# Altium PCB TK032F8004_TK499.PcbDoc
Units mm, origin at the board's own origin, x right, y up, seen from the top; angles counter-clockwise.
Board outline 50.5 x 93.4 mm, 2 copper layers (Top Layer, Bottom Layer); 81 components, 103 nets, 452 pads, 351 vias.
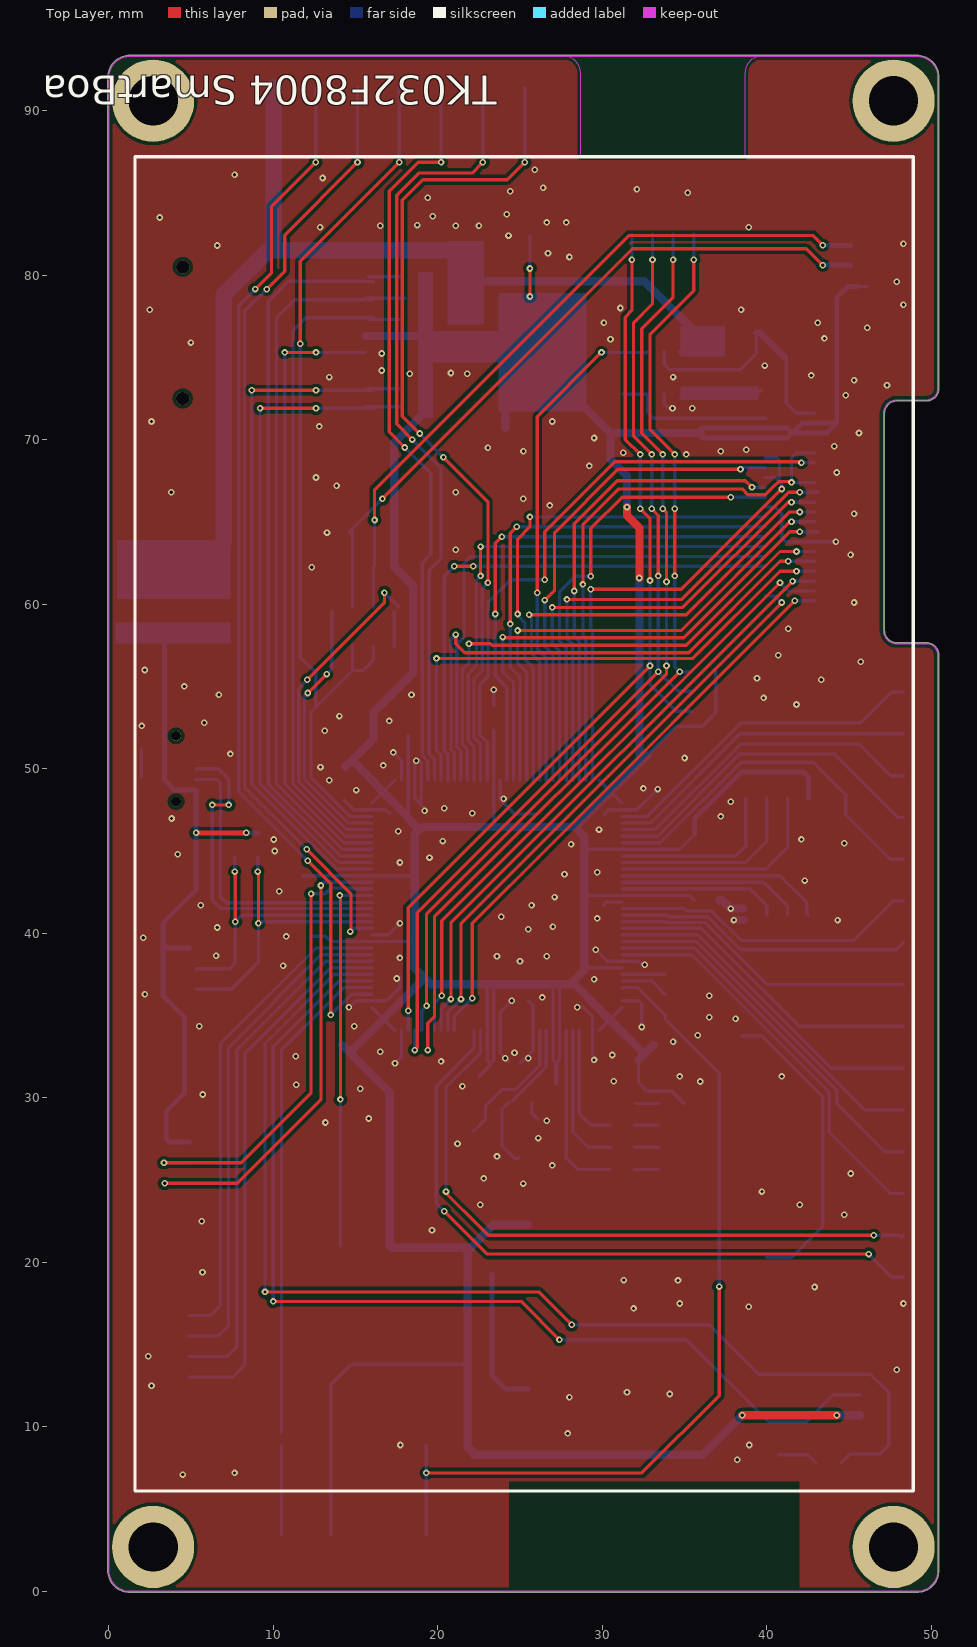
[diagram p0: Top Layer view]
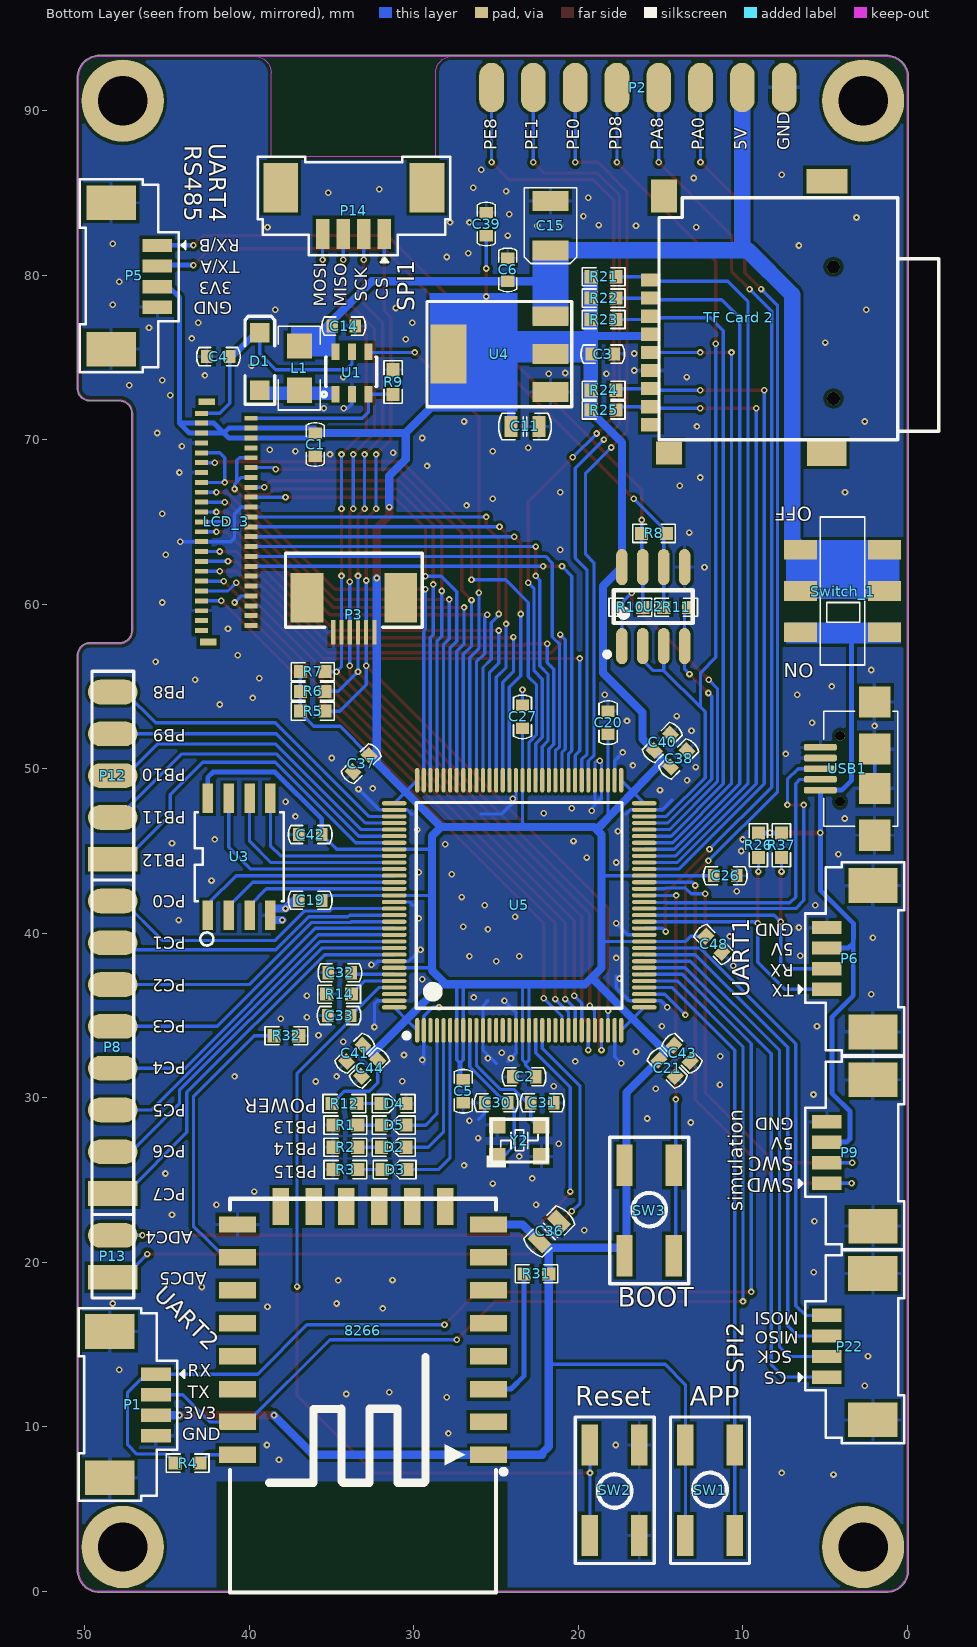
[diagram p1: Bottom Layer view, seen from below]
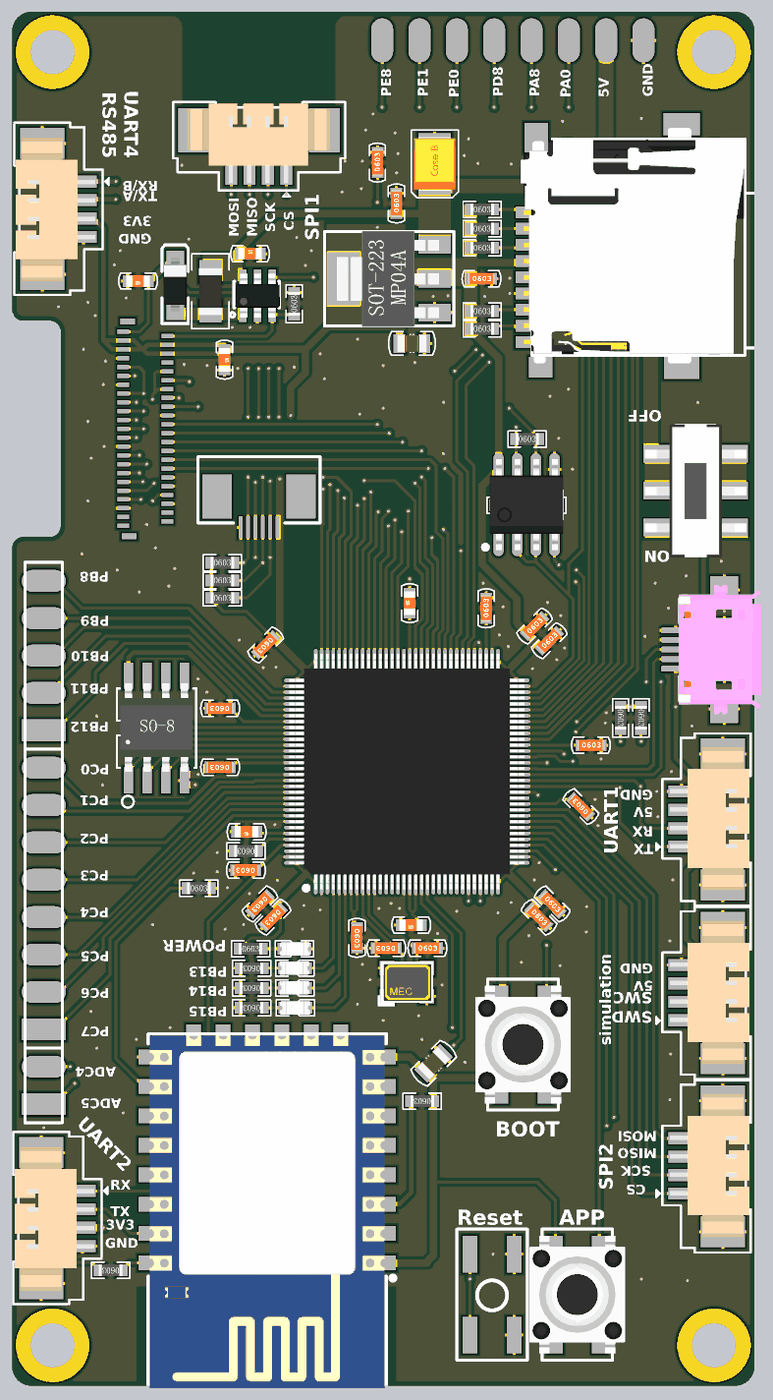
[diagram p2: 3D render of the assembled board from below, using the file's embedded part models]

## Layer stack, top to bottom
Top Solder: solder mask 0.0102, Solder Resist, Dk 3.5
Top Layer: signal copper 0.0356
Dielectric1: dielectric 0.32, FR-4, Dk 4.8
Bottom Layer: signal copper 0.0356
Bottom Solder: solder mask 0.0102, Solder Resist, Dk 3.5

## Board outline
-0.05,1.27 ccw(c1.27,1.27) 1.27,-0.05 49.13,-0.05 ccw(c49.13,1.27) 50.45,1.27 50.45,56.9 ccw(c49.7,56.9) 49.832,57.638 49.8,57.65 47.9,57.65 cw(c47.9,58.4) 47.15,58.4 47.15,71.6 cw(c47.9,71.6) 47.9,72.35 49.7,72.35 ccw(c49.7,73.1) 50.45,73.1 50.45,92.03 ccw(c49.13,92.03) 49.13,93.35 1.27,93.35 ccw(c1.27,92.03) -0.05,92.03

## Design rules (kind name [scope] priority, off if disabled: settings)
Clearance Clearance_1 [inpolygon] p1: gap=0.2 // poly
Clearance [All] p2: gap=0.15
ComponentClearance [All] p1 off: gap=0.254 collisioncheckmode=3 verticalgap=0.254 showdistances=FALSE
Height [All] p1 off: minheight=0 maxheight=25.4 prefheight=12.7
HoleSize [All] p1 off: absolutevalues=TRUE maxlimit=2.54 minlimit=0.025 maxpercent=80.000 minpercent=20.000
MinimumSolderMaskSliver [All] p1 off: minsoldermaskwidth=0.254
PlaneConnect [All] p1: planeconnectstyle=Direct reliefexpansion=0.508 reliefentries=4 reliefconductorwidth=0.254 reliefairgap=0.254
PolygonConnect PolygonConnect_1 [IsVia] p1: connectstyle=Direct reliefconductorwidth=0.2 reliefentries=4 polygonreliefangle="90 Angle" airgapwidth=0.2
PolygonConnect [All] p2: connectstyle=Relief reliefconductorwidth=0.2 reliefentries=4 polygonreliefangle="90 Angle" airgapwidth=0.2
RoutingVias [All] p1: holewidth=0.711 width=1.27 viastyle="Through Hole" minholewidth=0.711 minwidth=1.27 maxholewidth=0.711 maxwidth=1.27
SilkToBoardRegionClearance [All] p1 off:
SilkToSilkClearance [All] p1 off: silktosilkclearance=0.254
SilkToSolderMaskClearance SilkscreenOverComponentPads [IsPad] p1 off: minsilkscreentomaskgap=0.254 clearancetoexposedcopper=TRUE
SolderMaskExpansion [All] p1: expansion=0.102
UnRoutedNet UnRoutedNet_1 [All] p1:
UnRoutedNet [All] p2:
Width [All] p1: maxlimit=2 minlimit=0.2 preferedwidth=0.2 minimp=50.000000 maximp=50.000000 favimp=50.000000
21 further rules are at their usual default settings.

## Components (designator, comment, footprint, x,y, rotation, side; value= is the part's Value field where it differs from the comment)
8266 "ESP8266-12E" ESP8266-12E 33.2,12 r0 bottom locked
C1 "475" C0603-2 36,70.4 r270 bottom
C2 "475" C0603-2 22.6,31.275 r0 bottom
C3 "104" C0603-1 19.22,75.2 r180 bottom
C4 "104" C0603-2 41.184,75.05 r0 bottom
C5 "104" C0603-1 27,31.1 r270 bottom
C6 "104" C0603-1 24.3,79.619 r90 bottom
C11 "22uF" C0805-3 24.1,70.8 r180 bottom
C14 "475" C0603-2 34.965,76.9 r180 bottom
C15 "100uF" "Case B 3528" 21.7,83 r90 bottom
C19 "104" C0603-1 35.6,42 r0 bottom
C20 "104" C0603-1 18.2,52.1 r90 bottom
C21 "104" C0603-1 15.1,32.3 r225 bottom
C26 "104" C0603-1 11.775,43.5 r180 bottom
C27 "104" C0603-2 23.4,52.449 r90 bottom
C30 "22pF" C0603-1 24.3,29.7 r0 bottom
C31 "22pF" C0603-1 22.9,29.7 r180 bottom
C32 "225" C0603-2 33.8,37.6 r0 bottom
C33 "104" C0603-1 33.845,35 r0 bottom
C36 "22uF" C0805-3 22.373,21.273 r135 bottom
C37 "104" C0603-1 32.71,50.8 r315 bottom
C38 "104" C0603-1 14.4,50.1 r135 bottom
C39 "104" C0603-1 25.6,82.4 r90 bottom
C40 "104" C0603-1 15.4,51.1 r135 bottom
C41 "104" C0603-1 33.1,33.2 r315 bottom
C42 "104" C0603-1 35.6,46 r0 bottom
C43 "104" C0603-1 14.2,33.2 r225 bottom
C44 "104" C0603-1 32.2,32.3 r315 bottom
C48 "104" C0603-1 11.268,38.827 r45 bottom
D1 "SS14" SOD123 39.365,73 r90 bottom
D2 "LED" D0603 30.475,26.999 r0 bottom
D3 "LED" D0603 30.425,25.64 r0 bottom
D4 "LED" D0603 31.988,29.65 r180 bottom
D5 "LED" D0603 30.475,28.34 r0 bottom
L1 "22uH" L1206 36.965,73 r90 bottom
LCD_3 "TK032F8004" TK032F8004 48.9,87.2 r180 top locked
P1 "BHEADSMD1x4" BHEADSMD1x4 45.676,13.2 r90 bottom locked
P2 "PC0~PC7" HDR1X8#1 7.5,91.4 r0 top locked
P3 "TP_Cap_3.2inch" TK032F8004_CTP 1.6,6.1 r0 top locked
P5 "BHEADSMD1x4" BHEADSMD1x4 45.6,81.8 r90 bottom locked
P6 "BHEADSMD1x4" BHEADSMD1x4 4.904,36.6 r270 bottom locked
P8 "PC0~PC7" HDR1X8#2 48.3,24.18 r90 bottom
P9 "SW仿真接口" BHEADSMD1x4 4.904,24.8 r270 bottom locked
P12 "Header 5" HDR1X5 48.3,44.5 r90 bottom
P13 "Header 2" HDR1X2 48.3,19.1 r90 bottom
P14 "Header 4" BHEADSMD1x4 31.8,82.5 r180 bottom locked
P22 "BHEADSMD1x4" BHEADSMD1x4 4.904,13.025 r270 bottom locked
R1 "4.7K" R0603 33.417,28.34 r0 bottom
R2 "4.7K" R0603 33.417,26.999 r0 bottom
R3 "4.7K" R0603 33.417,25.64 r0 bottom
R4 "4.7K" R0603 43,7.8 r0 bottom
R5 "47K" R0603 36.9,53.5 r180 bottom
R6 "47K" R0603 36.9,54.7 r180 bottom
R7 "18K" R0603 36.9,55.899 r180 bottom
R8 "510R" R0603 16.159,64.302 r180 bottom
R9 "5R1" R0603 31.265,72.75 r90 bottom
R10 "0R" R0603 17.589,59.805 r180 bottom
R11 "0R" R0603 13.319,59.805 r0 bottom
R12 "4.7K" R0603 34.975,29.65 r180 bottom
R14 "10K" R0603 33.8,36.3 r0 bottom
R21 "10K" R0603 19.22,79.9 r180 bottom
R22 "10K" R0603 19.22,78.6 r180 bottom
R23 "10K" R0603 19.22,77.3 r180 bottom
R24 "10K" R0603 19.22,73 r180 bottom
R25 "10K" R0603 19.22,71.8 r180 bottom
R26 "4.7K" R0603 9.062,46.1 r270 bottom
R31 "1K" R0603 21.8,19.3 r0 bottom
R32 "1K" R0603 38.5,33.775 r180 bottom
R37 "4.7K" R0603 7.662,46.1 r270 bottom
SW1 "SW" SW 10.5,3.4 r90 bottom
SW2 "SW" SW 19.3,8.9 r270 bottom
SW3 "SW" SW 14.2,20.4 r90 bottom
Switch_1 "Switch_6脚贴片" SWITCH_6脚贴片 1.4,58.3 r90 bottom
"TF Card 2" "TF 卡" Micro_SD 15.5,79.7 r270 bottom locked
U1 "PT4103" SOT23-6 34.765,72.75 r90 bottom locked
U2 "MAX485" SOP8-150 17.359,57.451 r90 bottom
U3 "W25Q32" SOP8-215-50 42.53,41.1 r90 bottom
U4 "AMS1117-3.3V" SOT-223 21.7,72.9 r90 bottom
U5 "TKM32F499GT8" LQFP128 29.8,34.1 r180 bottom locked
USB1 "Micro USB" MicroUSB_带定位柱 4.6,50 r90 bottom locked
Y2 "12M" X3225 23.6,27.4 r180 bottom

## Footprints (in the part's own frame and the unit in brackets; to place one, negate y for a bottom-side part, rotate by r counter-clockwise, add the part's x,y. Pads: shape width x height; smd on the part's side, far side on the other; paste and mask are expansions set on the pad)
BHEADSMD1x4 [mil]
  rect 32x71 smd: 1(0,0) 2(-49.21,0) 3(-98.43,0) 4(-147.64,0)
  rect 83x118 smd: 5(102.36,110.24) 6(-248.03,110.24)
  silkscreen extent -303,-68 158,185, body extent -267,-32 117,181, height 134
C0603-1 [mm]
  rect 0.7x0.8 smd mask+0.1: 1(0,0) 2(1.4,0)
  silkscreen extent -0.62,-0.55 2.02,0.55, body extent -0.3,-0.39 1.7,0.39, height 0.79
C0603-2 [mm]
  rect 0.7x0.8 smd mask+0.1: 1(0,0) 2(1.4,0)
  silkscreen extent -0.62,-0.55 2.02,0.55, body extent -0.1,-0.4 1.5,0.4, height 0.3
C0805-3 [mm]
  rect 0.8x1.27 smd mask+0.1: 1(0,0) 2(1.7,0)
  silkscreen extent -0.75,-0.8 2.45,0.8, body extent -0.15,-0.6 1.85,0.6, height 1.2
"Case B 3528" [mm]
  rect 1.2x2.2 smd: 1(-1.5,0) 2(1.5,0)
  silkscreen extent -2.3,-1.6 2.3,1.6, body extent -1.85,-1.4 1.85,1.42, height 2.09
D0603 [mm]
  rect 0.8x0.8 smd mask+0.1: 1(0,0) 2(1.5,0)
  silkscreen extent -0.55,-0.55 2.05,0.55, body extent -0.26,-0.46 1.8,0.45, height 0.85
ESP8266-12E [mm]
  rect 2.25x1 smd: 1(-7.725,3.7) 2(-7.725,1.7) 3(-7.725,-0.3) 4(-7.725,-2.3) 5(-7.725,-4.3) 6(-7.725,-6.3) 7(-7.725,-8.3) 8(-7.725,-10.3) 15(7.525,-10.3) 16(7.525,-8.3) 17(7.525,-6.3) 18(7.525,-4.3) 19(7.525,-2.3) 20(7.525,-0.3) 21(7.525,1.7) 22(7.525,3.7)
  rect 1x2.25 smd: 9(-5.1,-11.4) 10(-3.1,-11.4) 11(-1.1,-11.4) 12(0.9,-11.4) 13(2.9,-11.4) 14(4.9,-11.4)
  silkscreen extent -8.8,-11.87 7.98,12.07, body extent -8.1,-11.79 7.9,12.21, height 2.75
HDR1X2 [mm] "Connector; Header; 2 Position"
  rect 1.5x3 smd: 1(0,0)
  oval 1.5x3 smd: 2(2.54,0)
  silkscreen extent -1.27,-1.27 3.81,1.27
HDR1X5 [mm] "Connector; Header; 5 Position"
  rect 1.5x3 smd: 1(0,0)
  oval 1.5x3 smd: 2(2.54,0) 3(5.08,0) 4(7.62,0) 5(10.16,0)
  silkscreen extent -1.27,-1.27 11.43,1.27
HDR1X8#1 [mm] "Connector; Header; 8 Position"
  oval 1.5x3 smd far side: 1(0,0) 2(2.54,0) 3(5.08,0) 4(7.62,0) 5(10.16,0) 6(12.7,0) 7(15.24,0) 8(17.78,0)
HDR1X8#2 [mm] "Connector; Header; 8 Position"
  rect 1.5x3 smd: 1(0,0)
  oval 1.5x3 smd: 2(2.54,0) 3(5.08,0) 4(7.62,0) 5(10.16,0) 6(12.7,0) 7(15.24,0) 8(17.78,0)
  silkscreen extent -1.27,-1.27 19.05,1.27
L1206 [mil]
  rect 60x60 smd: 1(0,0) 2(106.3,0)
  silkscreen extent -47,-50 154,50, body extent -11,-32 115,31, height 43
LQFP128 [mm]
  oval 0.25x1.5 smd mask+0.051: 1(0,0) 2(0.4,0) 3(0.8,0) 4(1.2,0) 5(1.6,0) 6(2,0) 7(2.4,0) 8(2.8,0) 9(3.2,0) 10(3.6,0) 11(4,0) 12(4.4,0) 13(4.8,0) 14(5.2,0) 15(5.6,0) 16(6,0) 17(6.4,0) 18(6.8,0) 19(7.2,0) 20(7.6,0) 21(8,0) 22(8.4,0) 23(8.8,0) 24(9.2,0) 25(9.6,0) 26(10,0) 27(10.4,0) 28(10.8,0) 29(11.2,0) 30(11.6,0) 31(12,0) 32(12.4,0) 65(12.4,15.2) 66(12,15.2) 67(11.6,15.2) 68(11.2,15.2) 69(10.8,15.2) 70(10.4,15.2) 71(10,15.2) 72(9.6,15.2) 73(9.2,15.2) 74(8.8,15.2) 75(8.4,15.2) 76(8,15.2) 77(7.6,15.2) 78(7.2,15.2) 79(6.8,15.2) 80(6.4,15.2) 81(6,15.2) 82(5.6,15.2) 83(5.2,15.2) 84(4.8,15.2) 85(4.4,15.2) 86(4,15.2) 87(3.6,15.2) 88(3.2,15.2) 89(2.8,15.2) 90(2.4,15.2) 91(2,15.2) 92(1.6,15.2) 93(1.2,15.2) 94(0.8,15.2) 95(0.4,15.2) 96(0,15.2)
  oval 1.5x0.25 smd mask+0.051: 33(13.8,1.4) 34(13.8,1.8) 35(13.8,2.2) 36(13.8,2.6) 37(13.8,3) 38(13.8,3.4) 39(13.8,3.8) 40(13.8,4.2) 41(13.8,4.6) 42(13.8,5) 43(13.8,5.4) 44(13.8,5.8) 45(13.8,6.2) 46(13.8,6.6) 47(13.8,7) 48(13.8,7.4) 49(13.8,7.8) 50(13.8,8.2) 51(13.8,8.6) 52(13.8,9) 53(13.8,9.4) 54(13.8,9.8) 55(13.8,10.2) 56(13.8,10.6) 57(13.8,11) 58(13.8,11.4) 59(13.8,11.8) 60(13.8,12.2) 61(13.8,12.6) 62(13.8,13) 63(13.8,13.4) 64(13.8,13.8) 97(-1.4,13.8) 98(-1.4,13.4) 99(-1.4,13) 100(-1.4,12.6) 101(-1.4,12.2) 102(-1.4,11.8) 103(-1.4,11.4) 104(-1.4,11) 105(-1.4,10.6) 106(-1.4,10.2) 107(-1.4,9.8) 108(-1.4,9.4) 109(-1.4,9) 110(-1.4,8.6) 111(-1.4,8.2) 112(-1.4,7.8) 113(-1.4,7.4) 114(-1.4,7) 115(-1.4,6.6) 116(-1.4,6.2) 117(-1.4,5.8) 118(-1.4,5.4) 119(-1.4,5) 120(-1.4,4.6) 121(-1.4,4.2) 122(-1.4,3.8) 123(-1.4,3.4) 124(-1.4,3) 125(-1.4,2.6) 126(-1.4,2.2) 127(-1.4,1.8) 128(-1.4,1.4)
  silkscreen extent -0.8,-0.47 12.45,13.85, body extent -1.8,-0.4 14.2,15.6, height 1.45
Micro_SD [mm]
  rect 1.5x2.5 smd: 0(-6,10.6)
  rect 2x1.6 smd: 0(-5.1,0.7)
  rect 1.4x1.6 smd: 0(10.5,1)
  rect 1.6x2.4 smd: 0(10.5,10.6)
  rect 0.8x1.2 smd: 1(0,-0.1) 2(1.1,-0.1) 3(2.2,-0.1) 4(3.3,-0.1) 5(4.4,-0.1) 6(5.5,-0.1) 7(6.6,-0.1) 8(7.7,-0.1) 9(8.8,-0.1)
  silkscreen extent -5,0.4 9.7,17.4, body extent -5.75,-0.4 10.25,14.85, height 1.85
MicroUSB_带定位柱 [mm]
  rrect50% 0.4x2 smd: 1(-1.3,0.7) 2(-0.65,0.7) 3(0,0.7)
  rrect50% 0.4x2 smd mask+0.1: 4(0.65,0.7) 5(1.3,0.7)
  rect 1.9x1.9 smd: 6(-4.05,-2.6) 7(-1.2,-2.6) 8(1.2,-2.6) 9(4.05,-2.6)
  round 0.6 hole 0.6: 10(-2,-0.5) 11(2,-0.5)
  silkscreen extent -3.5,-4 3.5,0.5, body extent -4.4,-5.12 4.4,0.51, height 2.79
R0603 [mm]
  rect 0.8x0.8 smd mask+0.1: 1(0,0) 2(1.5,0)
  silkscreen extent -0.55,-0.55 2.05,0.55, body extent -0.05,-0.4 1.55,0.4, height 0.45
SOD123 [mm]
  rect 1.2x1.2 smd: 1(0,0) 2(3.5,0)
  silkscreen extent -0.85,-0.9 4.5,0.9, body extent -0.05,-0.8 3.65,0.8, height 1.27
SOP8-150 [mm]
  oval 2.2x0.7 smd: 1(0,0) 2(0,-1.27) 3(0,-2.54) 4(0,-3.81) 5(4.8,-3.81) 6(4.8,-2.54) 7(4.8,-1.27) 8(4.8,0)
  silkscreen extent -0.65,-4.31 3.4,1.04, body extent -0.7,-4.41 5.5,0.59, height 1.75
SOP8-215-50 [mil]
  rect 70x25 smd: 1(0,0) 2(0,-50) 3(0,-100) 4(0,-150) 5(280,-150) 6(280,-100) 7(280,-50) 8(280,0)
  silkscreen extent -73,-181 246,31, body extent 24,-171 260,22
SOT23-6 [mm]
  rect 1x0.5 smd: 1(0,0) 2(0,-1) 3(0,-2) 4(2.6,-2) 5(2.6,-1) 6(2.6,0)
  silkscreen extent -0.15,-2.5 2.27,0.85, body extent -0.2,-2.52 2.8,0.48, height 1.3
SOT-223 [mm]
  rect 1.2x2.2 smd: 1(0,0) 2(2.3,0) 3(4.6,0)
  rect 3.6x2.2 smd: 2(2.3,6.2)
  silkscreen extent -0.9,-1.3 5.5,7.5, body extent -0.97,-0.31 5.53,6.65
SW [mm]
  rect 2.5x1 smd: 1(0,0) 2(5.5,0) 3(5.5,3) 4(0,3)
  silkscreen extent -1.7,-0.9 7.2,3.9, body extent -1.25,-1.75 6.75,4.75, height 4.3
SWITCH_6脚贴片 [mm]
  rect 1.2x2 smd: 1(0,5.1) 2(2.5,5.1) 3(5,5.1) 4(0,0) 5(2.5,0) 6(5,0)
  silkscreen extent -2,1.2 7,3.9, body extent -2.05,-0.9 7,6, height 5.45
TK032F8004 [mm]
  rect 1x0.4 smd far side: 0(6.3,14.9) 0(6.4,29.5)
  rect 0.8x0.3 smd far side: 1(6,28.8) 2(9,28.5) 3(6,28.2) 4(9,27.9) 5(6,27.6) 6(9,27.3) 7(6,27) 8(9,26.7) 9(6,26.4) 10(9,26.1) 11(6,25.8) 12(9,25.5) 13(6,25.2) 14(9,24.9) 15(6,24.6) 16(9,24.3) 17(6,24) 18(9,23.7) 19(6,23.4) 20(9,23.1) 21(6,22.8) 22(9,22.5) 23(6,22.2) 24(9,21.9) 25(6,21.6) 26(9,21.3) 27(6,21) 28(9,20.7) 29(6,20.4) 30(9,20.1) 31(6,19.8) 32(9,19.5) 33(6,19.2) 34(9,18.9) 35(6,18.6) 36(9,18.3) 37(6,18) 38(9,17.7) 39(6,17.4) 40(9,17.1) 41(6,16.8) 42(9,16.5) 43(6,16.2) 44(9,15.9) 45(6,15.6)
  silkscreen extent 0,0 47.3,81.1
TK032F8004_CTP [mm]
  rect 0.25x1.5 smd far side: 1(30.8,52.2) 2(31.3,52.2) 3(31.8,52.2) 4(32.3,52.2) 5(32.8,52.2) 6(33.3,52.2)
  rect 2x3 smd far side: 7(29.2,54.3)
  rect 2x3 smd far side paste+0: 8(34.9,54.3)
  silkscreen extent 0,0 47.3,81.1
X3225 [mm]
  rect 1x1 smd: 1(-1.346,-0.965) 2(1.346,-0.965) 3(1.346,0.94) 4(-1.346,0.94)
  silkscreen extent -1.98,-1.65 1.7,1.3, body extent -1.55,-1.28 1.65,1.22, height 0.72

## Part data
C1 C2 C3 C4 C5 C6 C11 C14 C15 C19 C20 C21 C26 C27 C30 C31 C32 C33 C36 C37 C38 C39 C40 C41 C42 C43 C44 C48: library part cap
D1: library part "D Schottky", "Schottky Diode"
L1: library part Inductor
P2 P8: library part "Header 8", "Header, 8-Pin"
P3: library part BHEADSMD1x6
P9: library part BHEADSMD1x4
P12: "Header, 5-Pin"
P13: "Header, 2-Pin"
P14: "Header, 4-Pin"
R1 R2 R3 R4 R5 R6 R7 R8 R9 R10 R11 R12 R14 R21 R22 R23 R24 R25 R26 R31 R32 R37: library part Resistor
"TF Card 2": library part "Header 9", "Header, 9-Pin"
U1: library part PT4101
U3: library part W25Q16
U4: library part CON3, "Connector"
USB1: library part "Mini USB"
Y2: library part 晶振_无源_4PIN_SMD

## Free pads (board coordinates)
  round 5 hole 3: 3(2.7,2.7) 3(2.7,90.6) 3(47.7,2.7) 3(47.7,90.6)

## Via types
v1: diameter 0.4, hole 0.2, Top Layer to Bottom Layer, tented both sides, 349 vias
v2: diameter 0.8, hole 0.8, Top Layer to Bottom Layer, tented both sides, 2 vias

## Nets (pads, with @x,y where several pads share a name; then routed paths per layer and width w, separated by ;. In a path a pad name is that pad's centre, name@x,y a point inside that pad or via, vN(x,y) a via of type N, cw(c..) or ccw(c..) an arc to the next point about the centre after c; other vN are vias at no path point)
3.3V: 8266.1 8266.8 "TF Card 2.4" C1.1 C2.1 C3.1 C5.1 C11.1 C19.1 C20.1 C21.1 C26.1 C27.1 C36.1 C37.1 C38.1 C39.1 C40.1 C41.1 C42.1 C43.1 C44.1 C48.2 LCD_3.40 LCD_3.41 LCD_3.42 LCD_3.43 P1.3 P3.1 P5.3 R5.1 R6.1 R7.1 R12.1 R21.1 R22.1 R23.1 R24.1 R25.1 R31.1 SW1.3 SW1.4 SW3.3 SW3.4 U2.8 U3.8 U4.2 U5.1 U5.7 U5.8 U5.17 U5.18 U5.32 U5.33 U5.43 U5.53 U5.64 U5.65 U5.67 U5.80 U5.96 U5.97 U5.104 U5.111 U5.122 U5.128 | length 341.6
  Top Layer w0.2: v1(25.6,78.7) v1(25.6,80.4)
  Top Layer w0.5: v1(31.5,65.9) 31.5,65.384 32.253,64.631 v1(32.253,61.588) ; v1(38.5,10.7) v1(44.25,10.7)
  Bottom Layer w0.2: C26.1 12.5,43.5 U5.53 18.6,43.5 ; C48.2 13.176,39.817 13.493,39.5 U5.43 18.6,39.5 ; SW1.4 SW1.3 13.5,12.57 14.73,13.8 21.8,13.8 ; U5.33 16.7,34.8 U5.32 ; U5.64 16.688,48.588 U5.65 ; 18.2,47.016 U5.67 C20.1@18.2,52.02 ; C2.1@22.5,31.275 23.2,31.975 23.2,32.1 ; 23,36.7 U5.18 23,32.3 23.2,32.1 ; 23.4,36.7 U5.17 23.4,32.3 23.2,32.1 ; 23.4,46.45 U5.80 C27.1@23.4,52.349 ; v1(25.6,80.4) C39.1 ; 27,36.7 U5.8 27,32.3 27.2,32.1 27.4,32.3 U5.7 27.4,36.9 ; 28.9,42.3 U5.111 35.3,42.3 C19.1 ; 29,45.1 U5.104 34.7,45.1 C42.1 ; 29.05,37.9 U5.122 ; U5.1 30.45,34.75 U5.128 ; U5.96 30.5,48.6 U5.97 ; C44.1 32.2,30.9 32.7,30.4 34.225,30.4 R12.1 ; C37.1 34.491,52.581 36.081,52.581 36.9,53.4 R5.1 R6.1 R7.1 ; P5.3 P5.3@46.1,79.3
  Bottom Layer w0.25: C37.1@32.705,50.805 C37.1
  Bottom Layer w0.3: C5.1@27.2,30.9 27.2,32.1 ; C42.1 35.6,46.953 38.447,49.8 42.2,49.8 42.53,49.47 U3.8 ; C1.1@36,70.2 C1.1 ; C1.1@36,70.7 LCD_3.42 41.25,70.7 41.55,70.4 ; C1.1@36.1,70.1 LCD_3.40 41.25,70.1 41.55,70.4 ; 44.25,74.7 44.25,75.95 ; P5.3@45.5,79.3 44.9,79.3 44.25,78.65 44.25,75.95 ; 41.55,70.4 42.15,71 LCD_3.43 44.25,71 ; 41.55,70.4 LCD_3.41 43.65,70.4 44.25,71 ; 44.25,71 44.25,75.95
  Bottom Layer w0.5: C43.1 14.65,32.75 ; C38.1 14.825,50.525 14.833,50.516 16.688,48.588 18.2,47.016 18.204,47.012 18.798,46.394 ; C38.1@14.41,50.2 14.5,50.2 C40.1 16.1,51.8 16.1,53.43 18.5,55.83 18.5,61.109 U2.8 17.359,69.828 19.22,71.689 R25.1 ; 15.6,76.3 19.22,76.3 ; SW3.4@17.085,21 17.085,30.315 15.8,31.6 C21.1 14.65,32.75 ; SW3.4@17.201,20.884 C36.1@21.984,20.884 ; 19.15,37.25 16.7,34.8 14.65,32.75 ; 19.22,72.2 R25.1 ; 19.22,76.4 R23.1 R22.1 R21.1 ; 21.2,76.1 U4.2@22.1,75.2 ; 21.8,13.7 R31.1 21.8,20.7 23.4,22.3 8266.8 ; 21.8,13.8 21.8,8.8 22.2,8.4 ; 22.2,8.3 8266.1 36.1,8.3 v1(38.5,10.7) ; 23.9,76.3 19.22,76.3 ; C11.1@24.1,70.7 24.1,72.4 ; U4.2@28.1,73.7 28.1,72.8 30.5,70.4 ; 28.2,78.2 28.8,78.2 28.8,77.9 ; 28.3,36.9 30.45,34.75 32.55,32.65 ; v1(31.5,65.9) 31.5,67.8 30.5,68.8 30.5,70.4 ; C44.1 32.55,32.65 ; 32.253,50.353 v1(32.253,61.588) ; C37.1@32.705,50.805 30.5,48.6 28.35,46.45 ; C41.1 32.55,32.65 ; C1.1 30.5,70.4 ; v1(44.25,10.7) P1.3 ; R25.1 R24.1 19.22,76.3 ; 28.35,46.45 23.4,46.45 19.05,46.45 18.6,46 18.6,37.9 19.6,36.9 27.4,36.9 28.05,36.9 28.9,37.75 28.9,45.9 28.35,46.45
5V: C6.1 C14.1 C15.1 L1.2 P2.2 Switch_1.2 Switch_1.3 Switch_1.5 Switch_1.6 U1.6 U4.3 | length 63.4
  Bottom Layer w0.3: U1.6 35.015,75.35 35.815,76.15 36.01,76.15 L1.2@36.965,76.15
  Bottom Layer w0.5: 21.9,79.619 C6.1 32.571,79.619 36.01,76.18 36.01,76.15 ; L1.2@36.765,76.35 36.965,76.15 L1.2
  Bottom Layer w0.8: C15.1@21.9,81.5 C15.1@22.2,81.5
  Bottom Layer w0.9: 3.9,61.8 6.6,61.8
  Bottom Layer w1: Switch_1.3 7,63.8 7,78.8 9.7,81.5 C15.1 ; 10.04,81.84 P2.2 ; C15.1@21.9,81.3 C15.1 ; C15.1@21.9,81.5 C15.1
ADC_4: P13.2 U5.19 | length 39.7
  Top Layer w0.2: v1(20.5,24.3) 20.5,24.2 22.6,22.1 23.06,21.64 v1(46.5,21.64)
  Bottom Layer w0.2: v1(20.5,24.3) 20.5,30.645 22.6,32.745 U5.19 ; v1(46.5,21.64) 48.02,21.64 48.16,21.5 P13.2
ADC_5: P13.1 U5.20 | length 41.7
  Top Layer w0.2: v1(20.4,23.1) 23,20.5 v1(46.2,20.5)
  Bottom Layer w0.2: v1(20.4,23.1) 19.9,23.6 19.9,30.7 22.2,33 U5.20 ; v1(46.2,20.5) 47.6,19.1 P13.1
BL_CTR: U1.4 U5.88 | length 30.7
  Top Layer w0.2: v1@26.05,60.601 26.05,65.113 26.05,65.486 26.05,71.4 v1(29.95,75.3)
  Bottom Layer w0.2: v1@26.05,60.601 26.05,57.301 26.6,56.751 U5.88 ; v1(29.95,75.3) 32.585,75.3 32.65,75.235 U1.4
  other v1: 26.05,60.7
BOOT0: R14.1 U5.124 | length 2.9
  Bottom Layer w0.2: U5.124 33,37.1 R14.1
CS: P12.2 U5.102 | length 20.8
  Bottom Layer w0.2: U5.102 33.365,45.9 38.365,50.9 44.1,50.9 47.96,47.04 P12.2
CTP_RST: P3.2 P14.1 R5.2 U5.30 | length 59.6
  Top Layer w0.2: v1(18.2,35.296) 18.2,41.551 v1(32.9,56.251) ; v1(31.8,80.928) 31.8,77.85 31.4,77.45 31.4,70.001 v1(32.301,69.1) ; v1(32.301,65.8) 32.9,65.201 v1(32.9,61.44)
  Bottom Layer w0.2: U5.30 v1(18.2,35.296) ; v1(31.8,80.928) P14.1 ; v1(32.301,65.8) v1(32.301,69.1) ; v1(32.9,61.44) P3.2 v1(32.9,56.251) 32.9,55.101 34.501,53.5 R5.2
DE: LCD_3.9 U5.26 | length 38.2
  Top Layer w0.2: v1(20.25,36.2) 20.25,40.749 v1(40.8,61.299)
  Bottom Layer w0.2: U5.26 19.8,35.75 v1(20.25,36.2) ; v1(40.8,61.299) 41.299,60.8 LCD_3.9
GND: 8266.15 "TF Card 2.6" C1.2 C2.2 C3.2 C4.2 C5.2 C6.2 C11.2 C14.2 C15.2 C19.2 C20.2 C21.2 C26.2 C27.2 C30.2 C31.2 C32.2 C33.2 C36.2 C37.2 C38.2 C39.2 C40.2 C41.2 C42.2 C43.2 C44.2 C48.1 D4.2 LCD_3.5 LCD_3.6 LCD_3.10 LCD_3.12 LCD_3.19 LCD_3.26 LCD_3.33 LCD_3.39 P1.4 P1.5 P1.6 P2.1 P3.6 P5.4 P5.5 P5.6 P6.4 P6.5 P6.6 P9.4 P9.5 P9.6 P22.5 P22.6 R1.2 R2.2 R3.2 R9.2 R14.2 R32.2 SW2.3 SW2.4 U1.2 U2.5 U3.4 U4.1 U5.2 U5.11 U5.16 U5.31 U5.34 U5.44 U5.63 U5.66 U5.68 U5.69 U5.81 U5.98 U5.112 U5.121 U5.127 USB1.4 USB1.5 USB1.6 USB1.7 USB1.8 USB1.9 Y2.2 Y2.4 | length 59.2
  Bottom Layer w0.2: USB1.7@2,49.501 USB1.8 ; 14.3,48.1 14.9,47.5 U5.63 16.85,47.5 17.1,47.25 ; v1(14.6,35.5) 15,35.9 U5.34 16.9,35.9 17.7,36.7 17.7,37.4 ; U5.44 17,39.9 v1(17.7,40.6) ; v1(17.3,50.99) 17.8,50.49 U5.66 ; v1(17.4,32.1) 17.8,32.5 U5.31 ; v1(18.7,50.477) 18.6,50.377 U5.68 18.6,48.2 19,47.8 ; v1@18.873,50.5 19,50.373 U5.69 19,47.8 ; 19.1,47.7 19,47.8 ; C27.2 v1(23.4,54.8) ; U5.81 23.8,48.1 24.65,47.25 25.9,47.25 ; 24.31,32.2 23.8,32.71 U5.16 23.8,35.2 v1(24.5,35.9) ; 25,32.1 25.8,32.9 U5.11 25.8,35.6 25.5,35.9 ; C30.2 25.7,29.073 26.073,28.7 ; v1@28.473,35.516 28.842,35.516 29.4,34.958 U5.2 29.4,32.1 ; 29.8,38.8 30.3,38.3 U5.121 32.202,38.3 v1@32.412,38.09 ; 30.066,41.7 30.266,41.9 U5.112 ; 30.131,47.227 30.405,47.5 U5.98 32.104,47.5 v1(33.365,48.761) ; U5.127 32.2,35.9 32.4,35.7 v1(32.4,34.3) ; U1.2 33.765,72.175 34.04,71.9 ; LCD_3.26 40.5,65.9 40.9,65.5 40.9,64.034 41.134,63.8 LCD_3.19 43.1,63.8 v1(44.2,63.8)
  Bottom Layer w0.5: C19.2@37.1,42 37.292,42 37.792,41.5 U3.4@38.57,41.5 ; v1(38,40.8) U3.4@38.6,40.8
  other v1: 4.5,7.1 7.65,7.2 38.2,8 17.731,8.9 38.932,8.9 27.9,9.6 28,11.8 34.105,12 31.5,12.1 2.6,12.5 47.9,13.467 2.4,14.3 31.9,17.2 38.9,17.3 34.7,17.5 48.3,17.5 42.9,18.5 34.6,18.9 31.3,18.92 5.7,19.4 19.647,21.946 5.657,22.5 44.7,22.9 22.575,23.5 42,23.5 39.7,24.3 25.2,24.787 22.8,25.1 45.1,25.4 26.95,25.89 23.6,26.435 21.2,27.2 26.1,27.55 13.175,28.5 26.625,28.6 15.813,28.74 5.714,30.2 15.294,30.543 21.5,30.7 11.4,30.8 30.7,31 35.957,30.992 34.7,31.3 40.9,31.3 20.2,32.21 29.5,32.3 24.1,32.4 25.5,32.4 11.375,32.523 30.6,32.6 24.665,32.745 16.5,32.8 34.3,33.412 35.8,33.8 5.5,34.34 14.925,34.34 38.1,34.8 36.5,34.9 28.477,35.5 26.356,36.1 36.5,36.2 2.204,36.3 29.5,37.2 17.5,37.25 10.6,38.022 32.581,38.09 25,38.3 17.7,38.5 23.6,38.6 26.625,38.6 6.525,38.625 29.6,39 2.104,39.723 10.8,39.806 25.5,40.25 6.6,40.35 27,40.4 44.3,40.8 29.7,40.9 23.85,40.999 37.805,41.5 5.6,41.7 25.7,41.7 27.1,42.2 10.375,42.55 42.3,43.2 27.7,43.58 29.7,43.7 17.7,44.3 19.5,44.6 4.2,44.8 10.1,45 28.1,45.4 44.7,45.473 20.3,45.6 10.025,45.7 42.1,45.7 17.6,46.2 29.8,46.3 3.824,46.973 37.2,47.1 22.1,47.3 19.2,47.45 20.4,47.6 37.8,48 24,48.177 15.044,48.7 32.5,48.8 13.4,49.3 12.875,50.1 16.688,50.2 35,50.65 7.4,50.9 13.127,52.3 2.004,52.6 5.8,52.8 17.047,52.903 14.025,53.2 41.8,53.9 39.8,54.3 6.7,54.5 18.404,54.5 4.6,55 43.3,55.4 39.4,55.5 2.2,56 45.7,56.5 40.7,56.9 41.3,58.5 45.3,60.1 12.338,62.251 45.087,63 21.1,63.3 13.269,64.35 45.3,65.5 26.8,66 25.2,66.4 3.8,66.8 21.1,66.8 13.852,67.2 12.6,67.7 44.25,68 29.2,68.4 35.1,69.1 31.265,69.2 25.206,69.3 37.2,69.3 38.755,69.376 23.05,69.5 44.1,69.6 29.5,70.1 45.6,70.4 12.8,70.8 2.6,71.1 26.95,71.1 34.265,71.9 35.469,71.9 44.8,72.7 47.3,73.3 45.3,73.6 13.41,73.8 34.3,73.8 42.7,73.9 18.3,74 21.8,74 20.8,74.05 16.6,74.2 39.865,74.5 16.6,75.235 5,75.9 30.5,76.1 43.5,76.15 46.1,76.8 30.1,77.1 43.1,77.1 2.5,77.9 38.435,77.9 31.1,78 48.3,78.2 47.9,79.6 28,81.1 26.7,81.32 6.6,81.8 48.3,81.9 24.3,82.4 12.847,82.9 38.9,82.9 16.5,83 21.1,83 22.5,83 18.762,83.038 26.625,83.2 27.8,83.2 3.1,83.5 19.695,83.575 24.2,83.7 19.4,84.7 35.2,85 24.4,85.1 32.106,85.217 26.4,85.3 13,85.9 7.65,86.1 25.9,86.4
HSYNC: LCD_3.8 U5.24 | length 35.6
  Top Layer w0.2: v1(21.414,36) 21.414,40.614 v1(40.9,60.1)
  Bottom Layer w0.2: U5.24 20.6,35.186 20.964,35.55 20.986,35.55 21.414,35.977 v1(21.414,36) ; LCD_3.8 40.5,60.5 v1(40.9,60.1)
INT: P3.4 P14.3 U5.28 | length 56
  Top Layer w0.2: v1(19.321,35.6) 19.321,41.171 33.9,55.75 v1(33.9,56.251) ; v1(33.68,65.8) 33.9,65.58 v1(33.9,61.36) ; v1(33.68,69.1) 32.4,70.38 32.4,76.75 34.3,78.65 v1(34.3,80.928)
  Bottom Layer w0.2: U5.28 19.025,34.125 19.025,35.304 v1(19.321,35.6) ; v1(33.68,65.8) v1(33.68,69.1) ; v1(33.9,56.251) P3.4 v1(33.9,61.36) ; v1(34.3,80.928) P14.3
LCD_CS: LCD_3.35 U5.79 | length 36.3
  Top Layer w0.2: v1(26.5,61.476) 26.5,64.4 30.75,68.65 42.05,68.65 v1(42.1,68.6)
  Bottom Layer w0.2: U5.79 23,51.6 22.55,52.05 22.55,55.1 23.05,55.6 23.05,60.101 24.425,61.476 v1(26.5,61.476) ; v1(42.1,68.6) LCD_3.35
LCD_SCK: LCD_3.32 LCD_3.36 U5.95 | length 29.4
  Top Layer w0.2: v1(29.3,60.901) 34.801,60.901 v1(40.9,67)
  Bottom Layer w0.2: v1(29.3,60.901) 29.3,58.467 29.4,58.367 U5.95 ; LCD_3.32 40.5,67.7 40.9,67.3 v1(40.9,67) ; LCD_3.36 40.6,68.9 40.766,68.734 40.766,67.5
LCD_SDI: LCD_3.31 LCD_3.37 U5.94 | length 34.1
  Top Layer w0.2: v1(28.821,61.201) 28.821,64.821 31,67 38.5,67 38.85,66.65 39.915,66.65 40.45,67.185 40.45,67.186 40.714,67.45 41.45,67.45 v1(41.5,67.4)
  Bottom Layer w0.2: v1(28.821,61.201) 28.821,58.143 29,57.964 U5.94 ; LCD_3.31 v1(41.5,67.4) 41.5,68.9 41.8,69.2 LCD_3.37
LD0: LCD_3.13 U5.72 | length 32.7
  Top Layer w0.2: v1(19.924,56.701) 35.501,56.701 40.8,62 v1(41.8,62)
  Bottom Layer w0.2: v1(19.924,56.701) 19.924,51.081 20.2,50.805 U5.72 ; v1(41.8,62) LCD_3.13
LD1: LCD_3.14 U5.73 | length 32.2
  Top Layer w0.2: v1(21,62.3) v1(22.15,62.3)
  Bottom Layer w0.2: U5.73 20.6,50.9 20.4,51.1 20.4,61.7 v1(21,62.3) ; v1@22.189,62.3 LCD_3.14
LD2: LCD_3.15 U5.74 | length 33.9
  Top Layer w0.2: v1(21.1,58.15) 21.1,57.605 21.654,57.051 35.251,57.051 40.8,62.6 v1(41.3,62.6)
  Bottom Layer w0.2: U5.74 21,50.995 20.8,51.195 20.8,57.85 v1(21.1,58.15) ; v1(41.3,62.6) LCD_3.15
LD3: LCD_3.16 U5.75 | length 32
  Bottom Layer w0.2: U5.75 21.4,51.09 21.15,51.34 21.15,57.555 21.6,58.005 21.6,62.5 22,62.9 LCD_3.16
LD4: LCD_3.17 U5.76 | length 32
  Top Layer w0.2: v1(21.9,57.6) 23.201,57.6 23.3,57.501 35.101,57.501 40.8,63.2 v1(41.8,63.2)
  Bottom Layer w0.2: U5.76 21.8,51.185 21.5,51.485 21.5,56.049 21.9,56.449 v1(21.9,57.6) ; v1(41.8,63.2) LCD_3.17
LD5: LCD_3.18 U5.77 | length 32
  Top Layer w0.2: v1(22.6,61.717) v1(22.6,63.5)
  Bottom Layer w0.2: U5.77 22.2,51.347 21.85,51.697 21.85,55.75 22.35,56.25 22.35,61.467 v1(22.6,61.717) ; v1(22.6,63.5) LCD_3.18
LD6: LCD_3.20 U5.82 | length 31.3
  Top Layer w0.2: v1(23.5,59.4) 23.5,63.7 v1(23.9,64.1)
  Bottom Layer w0.2: v1(23.5,59.4) 23.5,55.65 24.2,54.95 U5.82 ; v1(23.9,64.1) LCD_3.20
LD7: LCD_3.21 U5.83 | length 30.8
  Top Layer w0.2: v1(23.95,58) 24,57.95 34.95,57.95 41.4,64.4 v1(42,64.4)
  Bottom Layer w0.2: v1(23.95,58) 23.95,55.9 24.6,55.25 U5.83 ; v1(42,64.4) LCD_3.21 LCD_3.21@43.1,64.4
LD8: LCD_3.22 U5.84 | length 30.9
  Top Layer w0.2: v1(24.4,58.8) 24.4,64.3 v1(24.8,64.7)
  Bottom Layer w0.2: v1(24.4,58.8) 24.4,56.15 25,55.55 25,51.8 U5.84 ; v1(24.8,64.7) LCD_3.22
LD9: LCD_3.23 U5.85 | length 31.1
  Top Layer w0.2: v1(24.85,58.4) 34.8,58.4 41.4,65 v1(41.5,65)
  Bottom Layer w0.2: v1(24.85,58.4) 24.85,56.4 25.4,55.85 25.4,55.5 25.4,52.795 ; U5.85 25.4,51.4 25.4,52.795 ; 25.4,51.8 25.4,52.795 ; v1(41.5,65) LCD_3.23
LD10: LCD_3.24 U5.86 | length 31
  Top Layer w0.2: v1(24.85,59.401) 24.85,63.944 25.6,64.694 25.6,64.95 v1(25.6,65.3)
  Bottom Layer w0.2: v1(24.85,59.401) 24.85,59.315 25.3,58.865 25.3,56.65 25.8,56.15 U5.86 ; v1(25.6,65.3) LCD_3.24
LD11: LCD_3.25 U5.87 | length 30.3
  Top Layer w0.2: v1(25.55,59.351) 35.101,59.351 36.05,60.3 41.35,65.6 v1(42,65.6)
  Bottom Layer w0.2: v1(25.55,59.351) 25.7,59.201 25.7,57 26.2,56.5 U5.87 ; v1(42,65.6) LCD_3.25
LD12: LCD_3.27 U5.90 | length 29.3
  Top Layer w0.2: v1(26.95,59.801) 34.901,59.801 41.3,66.2 v1(41.5,66.2)
  Bottom Layer w0.2: v1(26.95,59.801) 26.95,57.601 27.4,57.151 U5.90 ; v1(41.5,66.2) LCD_3.27
LD13: LCD_3.28 U5.91 | length 28.1
  Top Layer w0.2: v1@29.3,61.8 29.3,64.6 31.2,66.5 v1(37.805,66.5)
  Bottom Layer w0.2: U5.91 27.8,57.351 27.4,57.751 27.4,59.615 27.4,59.988 27.4,60.75 28.35,61.7 v1(29.3,61.7) ; v1(37.805,66.5) LCD_3.28
LD14: LCD_3.29 U5.92 | length 29.7
  Top Layer w0.2: v1@27.85,60.301 27.8,60.301 27.813,60.289 v1(27.85,60.289) 34.825,60.289 41.336,66.8 v1(42,66.8) 41.464,66.8
  Bottom Layer w0.2: v1@27.85,60.301 27.85,57.901 28.2,57.551 U5.92 ; v1(42,66.8) LCD_3.29 LCD_3.29@43.1,66.8
LD15: LCD_3.30 U5.93 | length 28.4
  Top Layer w0.2: v1@28.3,60.975 28.3,64.9 30.9,67.5 38.7,67.5 v1(39.1,67.1)
  Bottom Layer w0.2: v1(28.3,60.801) 28.3,58.051 28.6,57.751 U5.93 ; v1(39.1,67.1) LCD_3.30
LEDA: C4.1 D1.2 LCD_3.45 U1.5 | length 15.2
  Bottom Layer w0.2: U1.5 33.765,74.575 34.09,74.25 38.395,74.25 39.365,75.22 D1.2@39.365,76.4 ; C4.1@41.184,75 41.184,72.216 41.8,71.6 LCD_3.45
  Bottom Layer w0.4: D1.2 39.6,76.5 C4.1@41.075,75.025
LEDK: LCD_3.44 R9.1 U1.3 | length 9.9
  Bottom Layer w0.2: R9.1 U1.3 32.765,71.67 33.135,71.3 LCD_3.44
Net8266_3: 8266.3 R31.2 | length 8.7
  Bottom Layer w0.3: R31.2 23.3,13.1 24.1,12.3 8266.3
Net8266_16: 8266.16 R32.1 | length 18.5
  Bottom Layer w0.2: R32.1 39.7,33.775 43.4,30.075 43.4,22.2 42.6,21.4 41.5,20.3 8266.16 8266.16@40,20.3
Net8266_22: 8266.22 R4.1 | length 2.5
  Bottom Layer w0.2: 8266.22 42.5,8.3 R4.1
NetC30_1: C30.1 U5.9 Y2.1 | length 9.3
  Bottom Layer w0.2: C30.1 23.9,29.3 23.9,27.1 24.665,26.335 Y2.1@24.946,26.335 ; C30.1@24.5,29.78 26.6,31.88 U5.9
NetC31_1: C31.1 U5.10 Y2.3 | length 8.3
  Bottom Layer w0.2: Y2.3@22.172,27.972 22.9,28.7 22.9,29.5 23.9,30.5 24.725,30.5 26.2,31.975 U5.10
NetC32_1: C32.1 U5.123 | length 2.6
  Bottom Layer w0.2: U5.123 C32.1@33.8,37.5
NetD1_1: D1.1 L1.1 U1.1 | length 5.1
  Bottom Layer w0.2: U1.1@34.765,72.5 34.965,72.7 39.335,72.7 39.501,72.851 D1.1@39.665,73
NetD2_2: D2.2 R2.1 | length 1.4
  Bottom Layer w0.2: D2.2 R2.1
NetD3_2: D3.2 R3.1 | length 1.5
  Bottom Layer w0.2: D3.2 R3.1
NetD4_1: D4.1 R12.2 | length 1.5
  Bottom Layer w0.2: D4.1 R12.2
NetD5_2: D5.2 R1.1 | length 1.4
  Bottom Layer w0.2: D5.2 R1.1
NRST: C33.1 SW2.1 SW2.2 U5.125 | length 53.1
  Top Layer w0.2: v1(19.3,7.2) 32.4,7.2 37.1,11.9 v1(37.1,18.525)
  Bottom Layer w0.2: SW2.2 SW2.1 ; U5.125@31.2,36.675 U5.125 32.145,36.7 C33.1 33.845,34.755 37.1,31.5 v1(37.1,18.525)
PA0: P2.3 U5.35 | length 63.6
  Top Layer w0.2: v1(8.9,79.15) 9.9,80.15 9.9,84.174 v1(12.58,86.854) ; v1(12.1,44.4) 13.5,43 v1(13.5,35.036)
  Bottom Layer w0.2: v1(8.9,79.15) 7.9,78.15 7.9,48.6 v1(12.1,44.4) ; v1(12.58,86.854) P2.3 ; v1(13.5,35.036) 14.764,36.3 U5.35
PA1: SW1.1 SW1.2 U5.36 | length 35.8
  Bottom Layer w0.2: SW1.1 SW1.2 ; SW1.2@10.5,9.65 10.5,32.9 14.3,36.7 U5.36
PA4: P22.1 U5.39 | length 32.5
  Bottom Layer w0.2: P22.1 7.539,13.025 8.276,13.761 8.276,32.676 13.5,37.9 U5.39
PA5: P22.2 U5.40 | length 31.6
  Bottom Layer w0.2: P22.2 7.175,14.275 7.781,14.881 7.781,32.881 13.2,38.3 U5.40
PA6: P22.3 U5.41 | length 30.6
  Bottom Layer w0.2: P22.3 6.675,15.525 7.286,16.136 7.286,33.086 12.9,38.7 U5.41
PA7: P22.4 U5.42 | length 29.7
  Bottom Layer w0.2: P22.4 6.2,16.775 6.791,17.366 6.791,33.291 12.6,39.1 U5.42
PA8: P2.4 U5.45 | length 58.2
  Top Layer w0.2: v1(9.6,79.144) 10.7,80.244 10.7,82.434 v1(15.12,86.854) ; v1(12.036,45.1) 14.725,42.412 14.725,40.138 v1(14.686,40.1)
  Bottom Layer w0.2: v1(9.6,79.144) 8.25,77.794 8.25,48.886 v1(12.036,45.1) ; v1(14.686,40.1) 14.886,40.3 U5.45 ; v1(15.12,86.854) P2.4
PA9: P6.1 R26.2 U5.46 | length 17.8
  Top Layer w0.2: v1(9.1,40.6) v1@9.1,43.75
  Bottom Layer w0.2: P6.1@5.312,36.6 7.462,36.6 9.1,38.238 v1(9.1,40.6) 9.2,40.7 U5.46 ; v1(9.062,43.75) R26.2
PA10: P6.2 R37.2 U5.47 | length 17.4
  Top Layer w0.2: v1(7.7,40.7) v1@7.7,43.75
  Bottom Layer w0.2: P6.2@5.312,37.85 7.35,37.85 7.7,38.2 v1(7.7,40.7) 8.1,41.1 U5.47 ; v1(7.662,43.75) R37.2
PA13: SW3.1 SW3.2 U5.50 | length 23.3
  Top Layer w0.2: v1(14.05,42.3) 14.085,42.265 v1(14.085,29.9)
  Bottom Layer w0.2: v1(14.05,42.3) U5.50 ; SW3.1@14.085,21 v1(14.085,29.9)
PB8: P12.5 U5.99 | length 20.2
  Bottom Layer w0.2: U5.99 32.735,47.1 38.435,52.8 45.7,52.8 47.56,54.66 P12.5
PB9: P12.4 U5.100 | length 19.3
  Bottom Layer w0.2: U5.100 32.945,46.7 38.365,52.12 P12.4
PB10: P12.3 U5.101 | length 20
  Bottom Layer w0.2: U5.101 33.2,46.3 38.4,51.5 45.6,51.5 47.52,49.58 P12.3
PB12: P12.1 U5.103 | length 22.3
  Bottom Layer w0.2: U5.103 33.535,45.5 38.435,50.4 42.83,50.4 44.8,48.43 44.8,47.2 47.5,44.5 P12.1
PB13: D5.1 U5.4 | length 7.2
  Bottom Layer w0.2: U5.4 28.6,29.027 29.287,28.34 D5.1
PB14: D2.1 U5.5 | length 8.8
  Bottom Layer w0.2: U5.5 28.2,27.929 29.13,26.999 D2.1
PB15: D3.1 U5.6 | length 10.7
  Bottom Layer w0.2: U5.6 27.8,26.364 28.524,25.64 D3.1
PC0: P8.8 U5.113 | length 18.9
  Bottom Layer w0.2: U5.113 34.996,41.5 35.146,41.35 36.65,41.35 38.435,39.565 45.285,39.565 47.68,41.96 P8.8
PC1: P8.7 U5.114 | length 18.1
  Bottom Layer w0.2: U5.114 33.905,41.1 34.005,41 36.4,41 38.4,39 47.88,39 P8.7
PC2: P8.6 U5.115 | length 18.7
  Bottom Layer w0.2: U5.115 33.81,40.7 33.86,40.65 36.25,40.65 40.02,36.88 P8.6
PC3: P8.5 U5.116 | length 19.6
  Bottom Layer w0.2: U5.116 36,40.3 41.96,34.34 P8.5
PC4: P8.4 U5.117 | length 20.5
  Bottom Layer w0.2: U5.117 35.8,39.9 43.9,31.8 P8.4
PC5: P8.3 U5.118 | length 21.3
  Bottom Layer w0.2: U5.118 35.705,39.5 45.945,29.26 P8.3
PC6: P8.2 U5.119 | length 22.7
  Bottom Layer w0.2: U5.119 35.605,39.1 44.25,30.455 44.25,29.65 47.18,26.72 P8.2
PC7: P8.1 U5.120 | length 24.5
  Bottom Layer w0.2: U5.120 35.425,38.7 43.8,30.325 43.8,27.9 47.52,24.18 P8.1
PCLK: LCD_3.11 U5.25 | length 37.7
  Top Layer w0.2: v1(20.8,36) 20.8,40.636 v1(41.564,61.4)
  Bottom Layer w0.2: U5.25 20.2,35.423 20.777,36 v1(20.8,36) 20.8,36.068 20.777,36.091 v1@20.732,36.045 ; v1(41.564,61.4) LCD_3.11
PD8: P2.5 U2.2 U2.3 U5.62 | length 56.6
  Top Layer w0.2: v1(11.65,75.83) 11.65,80.844 v1(17.66,86.854)
  Bottom Layer w0.2: v1(11.65,75.83) 11.65,56.775 12.58,55.845 12.58,53.728 ; U2.3 14.819,55.967 ; U5.62 14.657,47.1 12.3,49.457 12.3,53.448 12.58,53.728 ; U2.2 16.089,56.603 15.452,55.967 14.819,55.967 ; v1(17.66,86.854) P2.5 ; 12.58,53.728 14.819,55.967
PE0: P2.6 U5.70 | length 45.7
  Top Layer w0.2: v1@18,69.62 v1(18,69.52) 17.05,70.47 17.05,85.1 18.804,86.854 v1(20.2,86.854)
  Bottom Layer w0.2: v1(18,69.52) 19.57,67.95 19.57,63.02 19.05,62.5 19.05,50.818 19.4,50.468 U5.70 ; v1(20.2,86.854) P2.6
PE1: P2.7 U5.71 | length 47.7
  Top Layer w0.2: v1(18.45,70.004) 17.5,70.954 17.5,84.85 18.85,86.2 22.086,86.2 v1(22.74,86.854)
  Bottom Layer w0.2: v1(18.45,70.004) 20.2,68.254 20.2,62.8 19.474,62.074 19.474,50.889 19.8,50.563 U5.71 ; v1(22.74,86.854) P2.7
PE8: P2.8 U5.78 | length 50.9
  Top Layer w0.2: v1(18.9,70.37) 17.85,71.42 17.85,84.55 19.1,85.8 24.226,85.8 v1(25.28,86.854) ; v1(20.345,68.925) 23.05,66.22 v1(23.05,61.299)
  Bottom Layer w0.2: v1(18.9,70.37) v1(20.345,68.925) ; U5.78 22.6,51.505 22.2,51.905 22.2,55.45 22.7,55.95 22.7,60.949 v1(23.05,61.299) ; v1(25.28,86.854) P2.8
QSPI_CS: U3.1 U5.108 | length 12.7
  Bottom Layer w0.2: U5.108 40.8,43.5 42.43,41.87 42.43,41.2 U3.1
QSPI_Q0: U3.5 U5.105 | length 10.7
  Bottom Layer w0.2: U5.105 38.1,44.7 38.72,45.32 U3.5
QSPI_Q1: U3.2 U5.109 | length 11.2
  Bottom Layer w0.2: U5.109 39.8,43.1 41.26,41.64 U3.2
QSPI_Q2: U3.3 U5.110 | length 9.8
  Bottom Layer w0.2: U5.110 38.96,42.7 39.99,41.67 U3.3
QSPI_Q3: U3.7 U5.107 | length 13.6
  Bottom Layer w0.2: U5.107 39.93,43.9 41.26,45.23 U3.7
QSPI_SCK: U3.6 U5.106 | length 11.9
  Bottom Layer w0.2: U5.106 38.7,44.3 39.99,45.59 U3.6
RST: LCD_3.34 U5.89 | length 30.3
  Top Layer w0.2: v1@26.5,60.226 v1@26.512,60.238 ; v1(26.5,60.25) 27.1,60.85 27.1,64.35 30.95,68.2 v1(38.4,68.2)
  Bottom Layer w0.2: 26.5,59.496 v1(26.5,60.25) ; 26.5,59.795 26.5,57.451 27,56.951 U5.89 ; v1(38.4,68.2) 38.5,68.3 LCD_3.34
SCL: P3.3 P14.2 R6.2 U5.29 | length 60.5
  Top Layer w0.2: v1(18.6,32.9) 18.75,33.05 18.75,41.25 v1(33.4,55.9) ; v1(32.996,65.8) 32.996,65.792 33.4,65.388 v1(33.4,61.717) ; v1(32.996,69.1) 31.9,70.196 31.9,77.1 33.05,78.25 v1(33.05,80.928)
  Bottom Layer w0.2: v1(18.6,32.9) U5.29 ; v1(32.996,65.8) v1(32.996,69.1) ; v1(33.05,80.928) P14.2 ; v1(33.4,61.717) P3.3 v1(33.4,55.9) 34.6,54.7 R6.2
SDA: P3.5 P14.4 R7.2 U5.27 | length 59.7
  Top Layer w0.2: v1(19.4,32.9) 19.4,34.525 19.8,34.925 19.8,40.999 v1(34.7,55.899) ; v1(34.4,61.717) v1(34.4,65.8) ; v1(34.4,69.1) 32.9,70.6 32.9,76.41 35.55,79.06 v1(35.55,80.928)
  Bottom Layer w0.2: v1(19.4,32.9) U5.27 ; v1(34.4,61.717) P3.5 34.4,56.199 v1(34.7,55.899) R7.2 ; v1(34.4,65.8) v1(34.4,69.1) ; v1(35.55,80.928) P14.4
SDIO2_CK: "TF Card 2.5" U5.58 | length 37.9
  Top Layer w0.2: v1(10.7,75.3) v1(12.6,75.3)
  Bottom Layer w0.2: v1(10.7,75.3) 10.7,49.077 14.277,45.5 U5.58 ; v1(12.6,75.3) 15.6,75.3
SDIO2_CMD: "TF Card 2.3" R23.2 U5.59 | length 40.8
  Bottom Layer w0.2: 11.196,50.705 11.2,50.701 11.2,49.072 14.372,45.9 U5.59 ; 11.2,50.705 11.2,76.625 11.975,77.4 16.1,77.4 ; 15.8,77.3 R23.2
SDIO2_D0: "TF Card 2.7" R24.2 U5.54 | length 42.7
  Top Layer w0.2: v1(8.7,73) v1(12.6,73)
  Bottom Layer w0.2: v1(8.7,73) 8.7,49.097 13.897,43.9 U5.54 ; v1(12.6,73) 16.02,73 ; 15.6,73.1 R24.2@17.62,73.1
SDIO2_D1: "TF Card 2.8" R25.2 U5.55 | length 40.7
  Top Layer w0.2: v1(9.2,71.9) v1(12.6,71.9)
  Bottom Layer w0.2: v1(9.2,71.9) 9.2,49.092 13.992,44.3 U5.55 ; v1(12.6,71.9) 16.2,71.9 ; 15.6,72 R25.2@17.7,72
SDIO2_D2: "TF Card 2.1" R21.2 U5.56 | length 46.3
  Bottom Layer w0.2: 15.8,79.9 R21.2 ; U5.56 14.087,44.7 9.7,49.087 9.7,78.4 10.919,79.619 15.597,79.619 16.1,79.6
SDIO2_D3: "TF Card 2.2" R22.2 U5.57 | length 44.4
  Bottom Layer w0.2: 15.6,78.6 R22.2 R22.2@18,78.6 ; U5.57 14.182,45.1 10.2,49.082 10.2,49.925 10.2,77.4 11.3,78.5 16.02,78.5
SWC: P9.2 U5.51 | length 28.3
  Top Layer w0.2: v1@3.292,26.119 v1@3.361,26.119 ; v1(3.361,26.05) 8.045,26.05 12.3,30.305 v1(12.3,42.4)
  Bottom Layer w0.2: v1(3.361,26.05) P9.2 ; v1(12.3,42.4) 13.15,42.4 13.5,42.75 14.686,42.75 14.736,42.7 U5.51
SWD: P9.1 U5.52 | length 29.3
  Top Layer w0.2: v1(3.4,24.8) 7.828,24.8 12.9,29.872 v1(12.9,42.9) v1@12.9,42.95
  Bottom Layer w0.2: v1(3.4,24.8) P9.1 ; v1@12.9,42.95 13.05,43.1 U5.52
TEST: U5.126
UART4_RX: R10.1 U2.1 U5.60 | length 22.7
  Top Layer w0.2: v1(12.075,55.4) 16.759,60.084 v1(16.759,60.7)
  Bottom Layer w0.2: v1(12.075,55.4) 11.55,54.875 11.55,49.217 14.467,46.3 U5.60 ; v1(16.759,60.7) 17.589,59.87 R10.1 ; U2.1 R10.1@17.359,59.575
UART4_RX/485B: P5.1 R8.1 R10.2 U2.7 | length 42.7
  Top Layer w0.2: v1(16.159,65.114) 16.159,66.959 31.6,82.4 42.813,82.4 v1(43.4,81.813)
  Bottom Layer w0.2: R10.2 U2.7 ; U2.7@16.159,62.321 R8.1 v1(16.159,65.114)
  Bottom Layer w0.3: v1(43.4,81.813) 45.087,81.813 P5.1@45.1,81.8
UART4_TX: R11.1 U2.4 U5.61 | length 16.1
  Top Layer w0.2: v1(12.1,54.6) v1(13.25,55.75)
  Bottom Layer w0.2: v1(12.1,54.6) 11.9,54.4 11.9,49.362 14.562,46.7 U5.61 ; v1(13.25,55.75) 13.549,56.049 U2.4 R11.1@13.549,59.575
UART4_TX/485A: P5.2 R8.2 R11.2 U2.6 | length 42.9
  Top Layer w0.2: v1(16.636,66.4) 31.836,81.6 42.4,81.6 v1(43.4,80.6)
  Bottom Layer w0.2: R8.2 14.659,64.423 R8.2@14.819,64.583 ; R11.2 U2.6 R8.2@14.819,64.583 ; v1(16.636,66.4) R8.2@14.819,64.583
  Bottom Layer w0.3: v1(43.4,80.6) 45.05,80.6 P5.2@45.1,80.55
USART2_RX: P1.1 R4.2 U5.38 | length 70.3
  Top Layer w0.2: v1(9.5,18.2) 26.14,18.2 v1(28.14,16.2)
  Bottom Layer w0.2: v1(9.5,18.2) 9.5,33.3 13.7,37.5 U5.38 ; v1(28.14,16.2) 36.5,16.2 39.5,13.2 P1.1 46.3,13.2 47.4,12.1 47.4,8.9 46.85,8.35 45.05,8.35 R4.2
USART2_TX: 8266.21 P1.2 U5.37 | length 62.5
  Top Layer w0.2: v1(10,17.625) 25.069,17.625 v1(27.394,15.3)
  Bottom Layer w0.2: v1(10,17.625) 10,33.1 14,37.1 U5.37 ; v1(27.394,15.3) 35.1,15.3 40.1,10.3 8266.21 42.4,10.3 44.05,11.95 P1.2
USB_DM/UART5_RX: U5.49 USB1.2 | length 17.9
  Bottom Layer w0.2: USB1.2 6.55,49.35 6.8,49.1 6.8,42.2 7.15,41.85 14.686,41.85 14.711,41.875 15.975,41.875 U5.49
USB_DP/UART5_TX: U5.48 USB1.3 | length 20.5
  Top Layer w0.2: v1(6.3,47.8) v1(7.3,47.8)
  Bottom Layer w0.2: USB1.3 6.65,50 7.3,49.35 v1(7.3,47.8) ; v1(6.3,47.8) 6.3,42 6.8,41.5 U5.48
VCC_IN: P6.3 P9.3 R26.1 R37.1 Switch_1.1 Switch_1.4 USB1.1 | length 42.5
  Top Layer w0.3: v1@5.362,46.1 v1@8.412,46.1
  Bottom Layer w0.3: Switch_1.4@0.7,58.3 Switch_1.4 ; 3.5,58.2 3.4,58.1 3.4,49.3 4,48.7 USB1.1 5.3,46.45 5.3,42.608 3.292,40.6 3.292,39.675 3.3,39.667 3.3,39.392 ; P9.3 3.7,27.3 3.5,27.5 3.5,29.176 4.6,30.276 4.6,34.9 3.3,36.2 3.3,39.392 ; P6.3 3.592,39.1 3.3,39.392 ; R37.1 v1(8.362,46.1) R26.1
  other v1: 5.312,46.1
VSYNC: LCD_3.7 U5.23 | length 35.9
  Top Layer w0.2: v1(22.1,36.05) 22.1,40.6 26.7,45.2 v1(41.7,60.2)
  Bottom Layer w0.2: U5.23 21,34.95 v1(22.1,36.05) ; v1(41.7,60.2) LCD_3.7
pads on no net: 8266.2 8266.4 8266.5 8266.6 8266.7 8266.9 8266.10 8266.11 8266.12 8266.13 8266.14 8266.17 8266.18 8266.19 8266.20 "TF Card 2.0" "TF Card 2.9" LCD_3.0 LCD_3.1 LCD_3.2 LCD_3.3 LCD_3.4 LCD_3.38 P3.7 P3.8 P14.5 P14.6 U5.3 U5.12 U5.13 U5.14 U5.15 U5.21 U5.22 USB1.10 USB1.11
copper on no net:
  other v2: 4.5,72.5 4.5,80.5

## Polygon pours and split planes (outlines as drawn)
GND on Top Layer "Top-No Net" (solid, remove dead copper, pour order 0): 0,0 0,93.3 50.4,93.3 50.4,0 12,0
GND on Bottom Layer "Top-No Net" (solid, remove dead copper, pour order 2): 0,0 0,93.3 50.4,93.3 50.4,0 12,0

## Keep-outs
Keep-Out Layer:
  lines w0.01: 27.675,93.3 cw(c27.675,92.3) 28.675,92.3 28.675,87.2 38.675,87.2 38.675,92.3 cw(c39.675,92.3) 39.675,93.3
  lines w0.1: 49.7,57.6 cw(c49.7,56.9) 50.4,56.9 50.4,56.4 50.4,1.27 cw(c49.13,1.27) 49.13,0 42,0 24.3,0 1.27,0 cw(c1.27,1.27) 0,1.27 0,60.2 0,92.03 cw(c1.27,92.03) 1.27,93.3 49.13,93.3 cw(c49.13,92.03) 50.4,92.03 50.4,73.1 cw(c49.7,73.1) 49.7,72.4 47.9,72.4 ccw(c47.9,71.6) 47.1,71.6 47.1,58.4 ccw(c47.9,58.4) 47.9,57.6 49.8,57.6

## Other copper
Top Layer:
  pour cut-out: 24.3,0 24.3,6.7 42,6.7 42,0
Bottom Layer:
  rectangle net 5V: 34.765,75.05 37.465,76.9
  rectangle net 3.3V: 18.8,71.3 19.7,80.2
  rectangle net 3.3V: 19,74.7 29,76.6
  region net VCC_IN: 0.4,58.9 0.4,57.6 7.4,57.6 7.4,58.9
  rectangle net 3.3V: 23.7,71.7 29.054,78.9
  rectangle net 5V: 20.6,77 22.8,82.067
  region net 5V: 0.5,63.9 0.5,60.3 7.4,60.3 7.4,63.9
  rectangle net NetD1_1: 34.765,72.4 39.485,73.225
  pour cut-out: 24.3,0 24.3,6.7 42,6.7 42,0

## Silkscreen, mask and mechanical layers (free items; w line width, h text height)
Top Overlay:
  text "TK032F8004 SmartBoard" at 23.6,92.7 h3 r180
Bottom Overlay:
  lines w0.5: 29.3,14.25 29.3,6.7 29.4,6.6 31,6.6 31,11.086 ; 31.014,11.1 32.7,11.1 32.7,6.6 34.3,6.6 34.4,6.7 34.4,11.1 34.414,11.086 36.1,11.086 36.1,6.6 38.8,6.6
  text "UART4" at 42.813,88 h1.8 r90
  text "RS485" at 44.3,87.9 h1.8 r90
  text "GND" at 6.885,87.579 h1.3 r270
  text "5V" at 9.485,87.58 h1.3 r270
  text "PA0" at 12.085,87.58 h1.3 r270
  text "PA8" at 14.585,87.579 h1.3 r270
  text "PD8" at 17.085,87.579 h1.3 r270
  text "PE0" at 19.685,87.58 h1.3 r270
  text "PE1" at 22.185,87.579 h1.3 r270
  text "PE8" at 24.685,87.579 h1.3 r270
  text "RX/B" at 40.575,82.45 h1.3 r180
  text "TX/A" at 40.585,81.15 h1.3 r180
  text "3V3" at 41.025,79.863 h1.3 r180
  text "GND" at 41.025,78.663 h1.3 r180
  text "CS" at 31.3,78.474 h1.3 r270
  text "SCK" at 32.569,78.374 h1.3 r270
  text "MISO" at 33.8,78.074 h1.3 r270
  text "MOSI" at 35.04,78.074 h1.3 r270
  text "SPI1" at 29.6,77.794 h1.8 r270
  text "OFF" at 5.8,66.225 h1.5 r180
  text "ON" at 5.7,56.725 h1.5 r180
  text "PB8" at 43.879,55.275 h1.3 r180
  text "PB9" at 43.88,52.675 h1.3 r180
  text "PB10" at 43.88,50.275 h1.3 r180
  text "PB11" at 43.879,47.675 h1.3 r180
  text "PB12" at 43.879,45.075 h1.3 r180
  text "PC0" at 43.88,42.575 h1.3 r180
  text "GND" at 6.9,40.862 h1.3 r180
  text "PC1" at 43.879,40.075 h1.3 r180
  text "5V" at 6.9,39.675 h1.3 r180
  text "RX" at 6.9,38.375 h1.3 r180
  text "PC2" at 43.879,37.475 h1.3 r180
  text "TX" at 6.9,37.175 h1.3 r180
  text "UART1" at 9.258,36.1 h1.8 r270
  text "PC3" at 43.879,34.975 h1.3 r180
  text "PC4" at 43.879,32.46 h1.3 r180
  text "POWER" at 35.875,30.25 h1.5 r180
  text "PC5" at 43.88,29.875 h1.3 r180
  text "GND" at 6.9,29.062 h1.3 r180
  text "PB13" at 35.875,28.833 h1.3 r180
  text "5V" at 6.9,27.875 h1.3 r180
  text "PB14" at 35.875,27.533 h1.3 r180
  text "PC6" at 43.88,27.383 h1.3 r180
  text "SWC" at 6.9,26.72 h1.5 r180
  text "PB15" at 35.875,26.133 h1.3 r180
  text "SWD" at 6.9,25.4 h1.5 r180
  text "PC7" at 43.88,24.766 h1.3 r180
  text "simulation" at 9.725,23.1 h1.5 r270
  text "ADC4" at 43.45,22.15 h1.3 r180
  text "ADC5" at 42.575,19.675 h1.3 r180
  text "UART2" at 46.1,17.7 h1.8 r45
  text "MOSI" at 6.6,17.25 h1.3 r180
  text "BOOT" at 17.6,16.9 h2
  text "MISO" at 6.6,16.1 h1.3 r180
  text "SCK" at 7,14.9 h1.3 r180
  text "CS" at 7.35,13.625 h1.3 r180
  text "SPI2" at 9.6,13.266 h1.8 r270
  text "RX" at 43.73,12.762 h1.3
  text "TX" at 43.755,11.475 h1.3
  text "APP" at 13.25,10.9 h2
  text "Reset" at 20.2,10.9 h2
  text "3V3" at 44.03,10.175 h1.3
  text "GND" at 44.08,8.925 h1.3
Top Solder:
  lines w0.4: 6.212,0.8 22.712,0.8 22.712,5.2 6.212,5.2 6.212,0.8
  text "TK499 inside" at 21.917,4 h3 r180

## Text inside footprints (layer, text, board x,y; h text height)
8266: Mechanical 13 "CUTOUT POLYGON" at 25.227,0.934 h0.25 r180; Mechanical 13 "ANTENNA AREA" at 25.227,0.426 h0.25 r180